# EAGLE board recnt brd (EAGLE 9.6.2)

Size 100 x 80 mm. Coordinates in mm from the lower left corner, seen from the top.
Outline: 0,0 100,0 100,80 0,80 0,0
Copper layers (1*16): Top 0.035mm / dielectric 1.5mm / Bottom 0.035mm
Design rules "default": minimum track width 6mil, minimum drill 0.35mm, track to track 6mil, track to pad 6mil, pad to pad 6mil, via to via 6mil, smd to smd 6mil, copper to edge 40mil, drill to drill 6mil, minimum pad ring 10mil, minimum via ring 8mil, stop-mask expansion 4mil, vias tented up to drill 0mil, thermal gap 10mil

## Footprints (pad centres in the part's own frame; a part is rotated, then mirrored left to right if it is on the bottom)
C2.5-3 = drill 0.813 pad 1.6 octagon: 1 -1.27,0; 2 1.27,0
DO41-10 = drill 1.118: A 5.08,0; C -5.08,0
JP1 = drill 0.914 long: 1 0,-1.27; 2 0,1.27
TO220H = drill 1.118 long: 1 -2.54,-10.16; 2 0,-10.16; 3 2.54,-10.16 | hole 3.302: 0,4.826

## Placement (x,y rotation side)
C1  1000uF  [C2.5-3]  16.51,25.4 0 top
C2  0.33uF  [C2.5-3]  5.08,7.62 0 top
C3  0.1uF  [C2.5-3]  8.89,27.94 0 top
D1  1N4004  [DO41-10]  5.08,17.78 0 top
D2  1N4004  [DO41-10]  16.51,36.83 0 top
D3  1N4004  [DO41-10]  6.35,35.56 0 top
D4  1N4004  [DO41-10]  21.59,49.53 0 top
I/P  12VAC  [JP1]  8.89,49.53 0 top
IC1  7805T  [TO220H]  34.29,25.4 0 top
O/P  [JP1]  3.81,49.53 0 top

## Library data of the parts
C1-C3 = capacitor-wima
D1-D4 = diode
I/P O/P = jumper
IC1 = linear

## Nets
D2: D2.C I/P.1
GND: C1.2 C2.2 C3.2 D3.A D4.A IC1.2
N$1: D1.A D4.C I/P.2
N$5: C1.1 C2.1 D1.C D2.A IC1.1
N$6: C3.1 IC1.3

## Tracks (layer width: path | path; a pad name or v marks a point on that pad's centre or on a via)
D2  (1 unrouted)
GND  (5 unrouted)
N$1  (2 unrouted)
N$5  (4 unrouted)
N$6  (1 unrouted)